# Altium PCB power-v3.1.PcbDoc (part 1 of 2)
Units mil, origin at the board's own origin, x right, y up, seen from the top; angles counter-clockwise.
Board outline 6120 x 3430.5 mil, 2 copper layers (Top Layer, Bottom Layer), stack 63.012 mil thick; 161 components, 68 nets, 413 pads, 6 vias.
Unrouted connection lines stored in the file: 242.
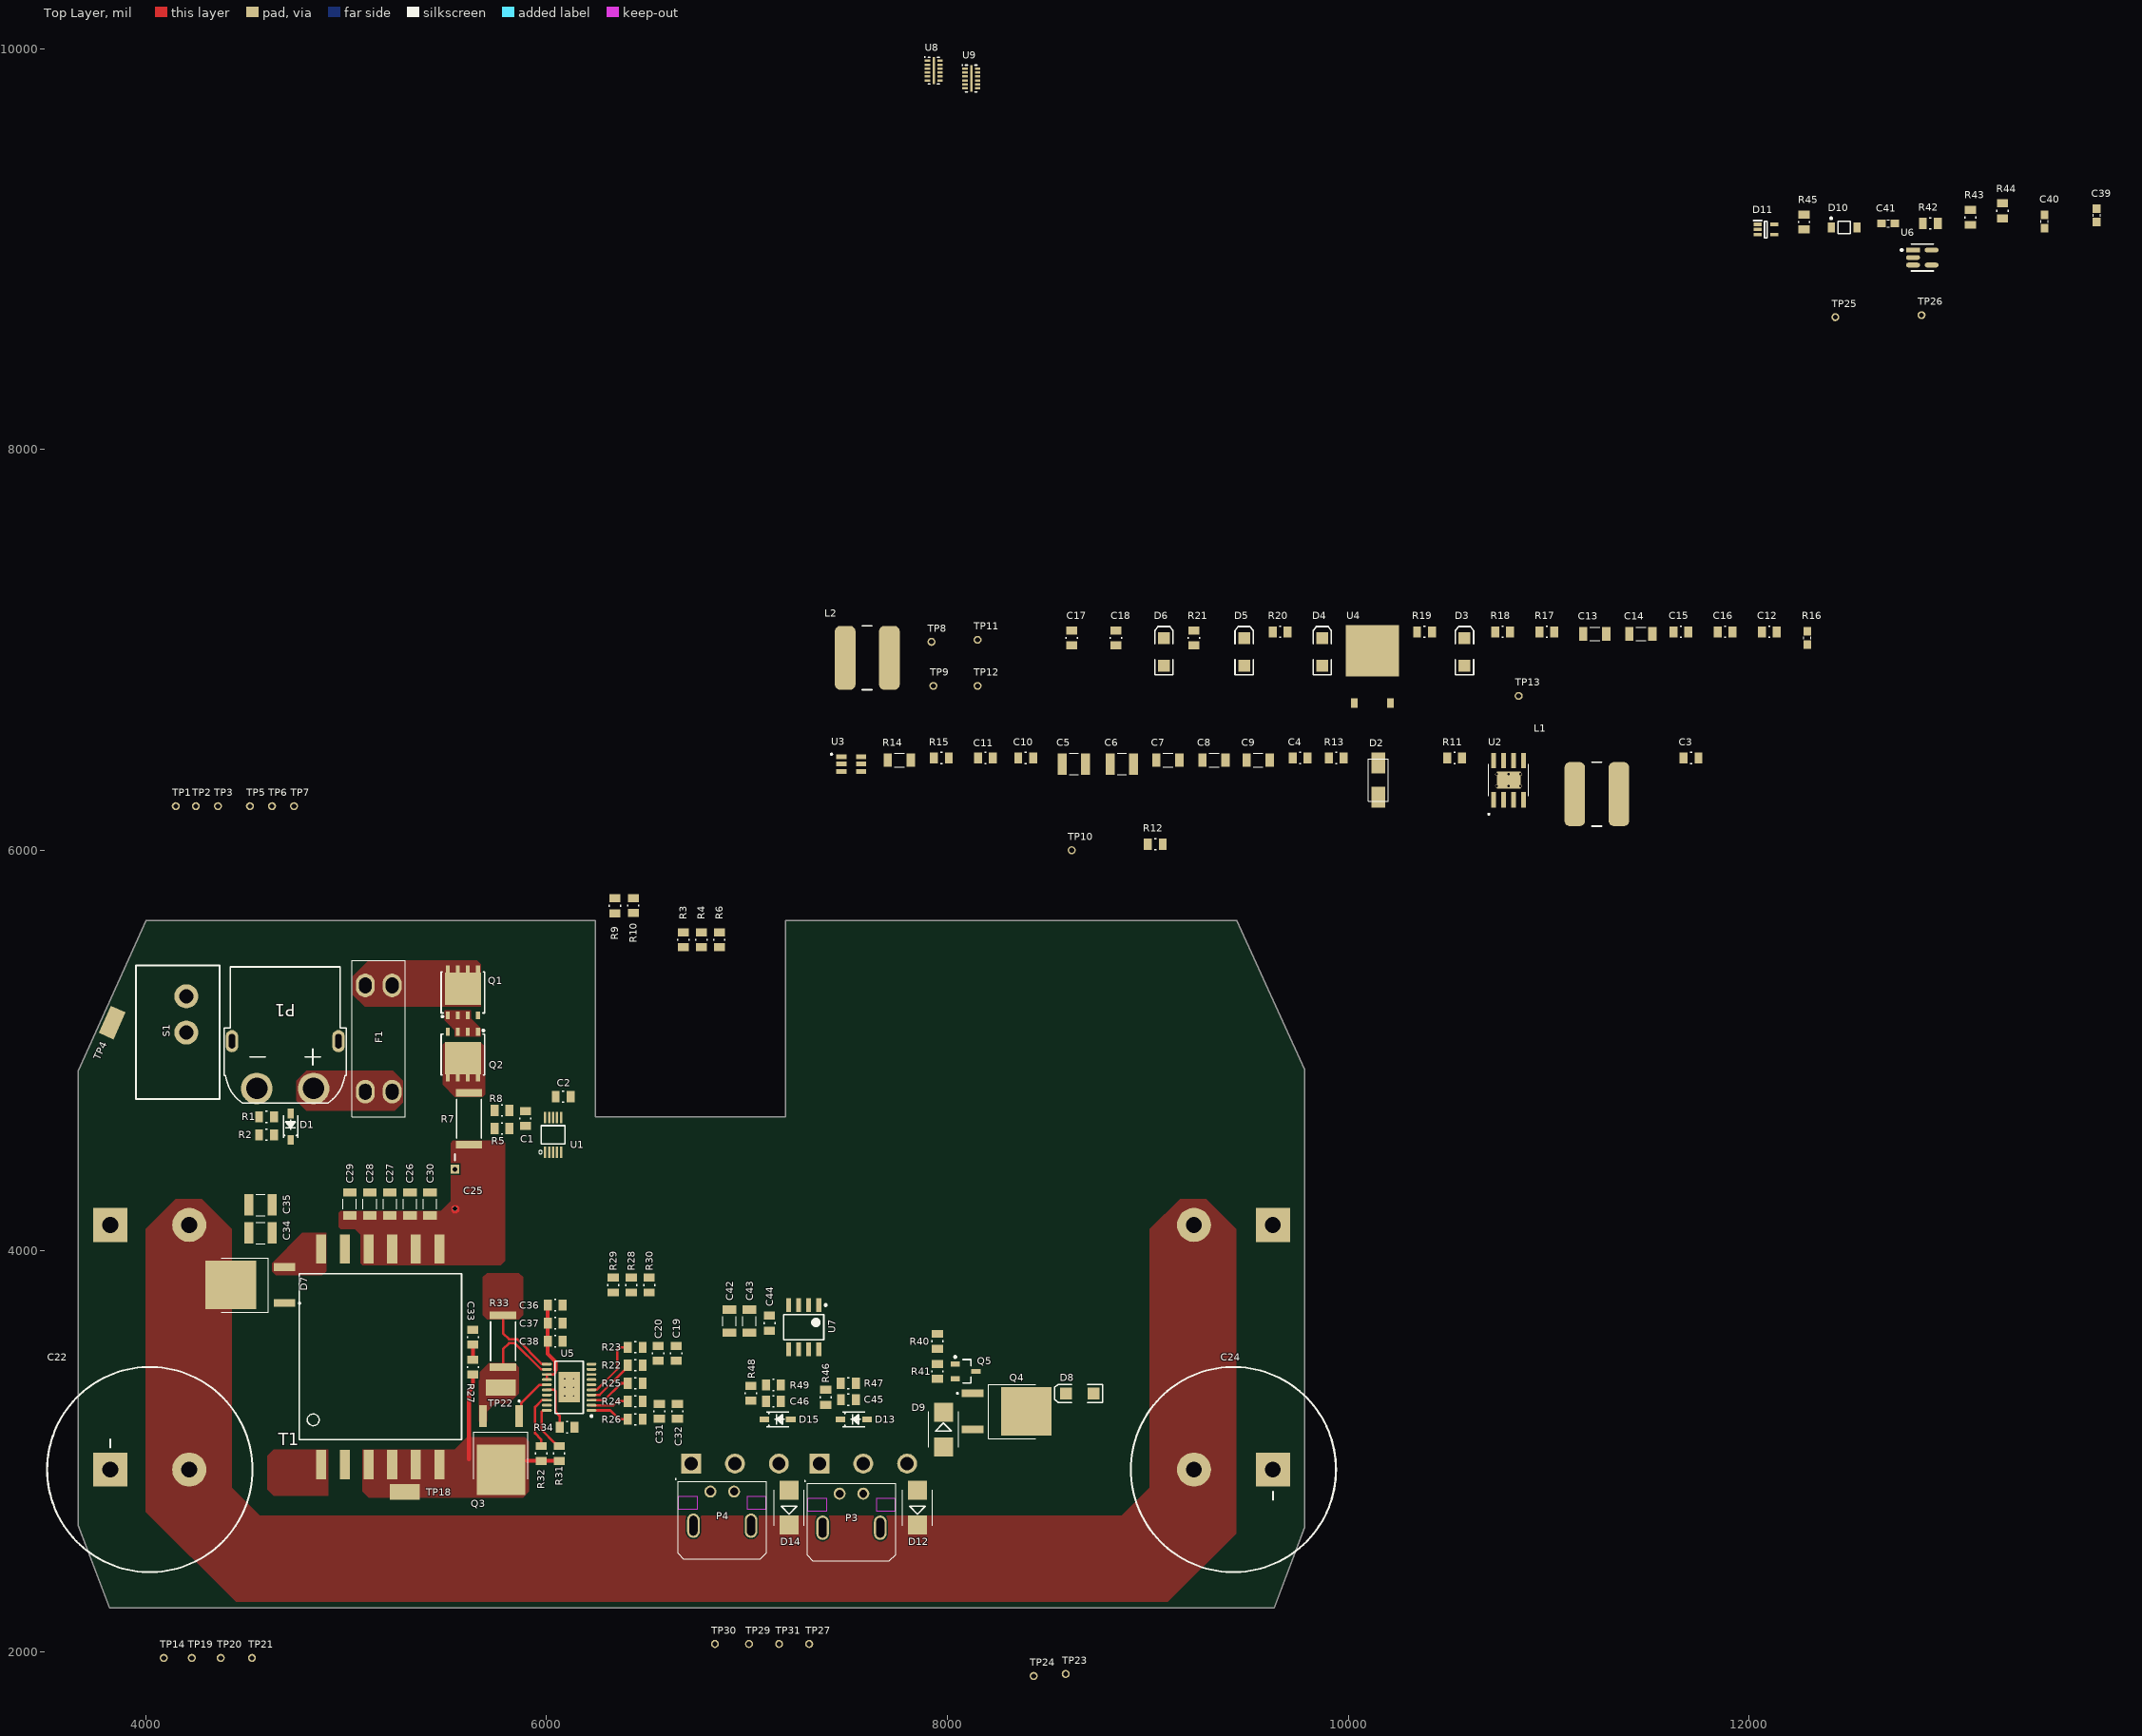
[diagram p0: Top Layer view]
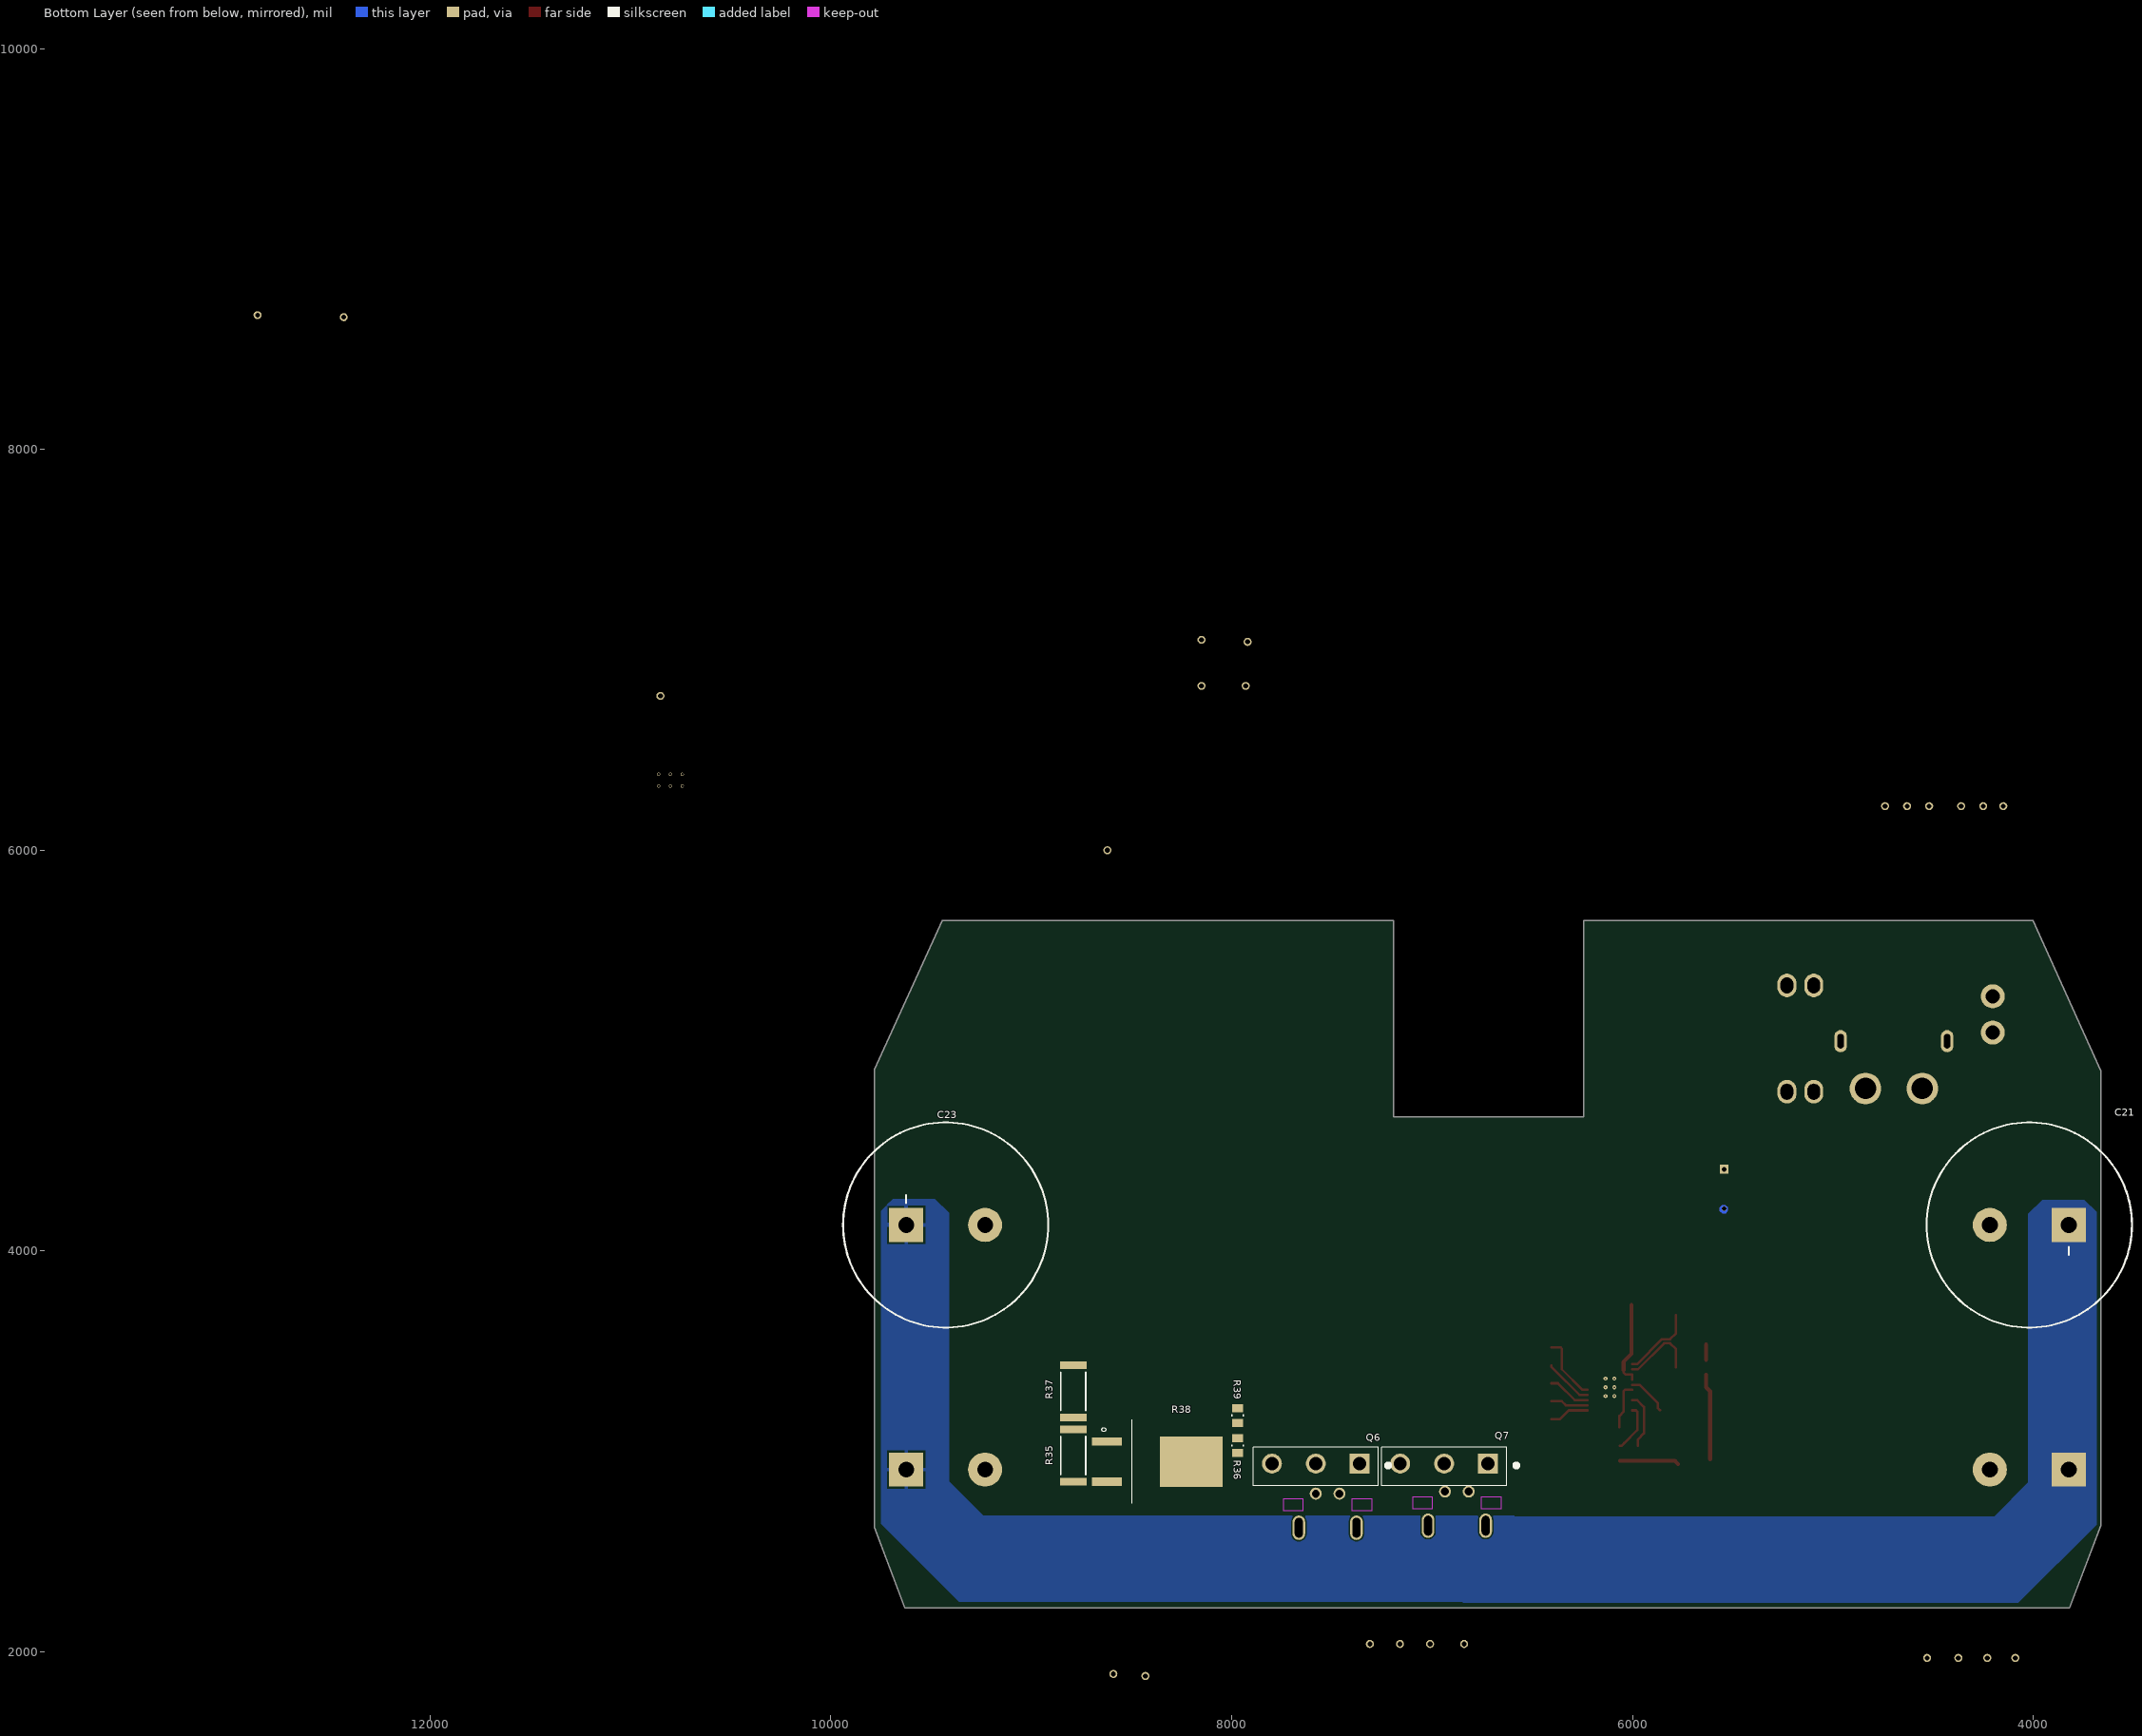
[diagram p1: Bottom Layer view, seen from below]

## Layer stack, top to bottom
Top Solder: solder mask 0.4, Solder Resist, Dk 3.5
Top Layer: signal copper 2.7559
Dielectric 1: dielectric 57.5, FR-4, Dk 4.8
Bottom Layer: signal copper 2.7559
Bottom Solder: solder mask 0.4, Solder Resist, Dk 3.5

## Board outline
9630,2220 9782.41,2621.28 9782.41,4905.08 9442.41,5650.5 7192.41,5650.5 7192.41,4670.5 6242.41,4670.5 6242.41,5650.5 4002.41,5650.5 3662.41,4899.48 3662.41,2631.16 3818.58,2220

## Design rules (kind name [scope] priority, off if disabled: settings)
BoardOutlineClearance [All] p1: gap=7.87 ignorepadtopadclearanceinfootprint=FALSE except(15.75: Arc-SplitBarrior Arc-SplitContinuation Track-SplitBarrior Track-SplitContinuation SMDPad-SplitBarrior SMDPad-SplitContinuation THPad-SplitBarrior THPad-SplitContinuation Via-SplitBarrior Via-SplitContinuation Fill-SplitBarrior Fill-SplitContinuation Poly-SplitBarrior Poly-SplitContinuation Region-SplitBarrior Region-SplitContinuation Text-SplitBarrior Text-SplitContinuation)
Clearance "Clearance Bottom Layer" [OnLayer('Bottom Layer')] p1: gap=8 ignorepadtopadclearanceinfootprint=TRUE except(10: Arc-Text Track-Text SMDPad-Text THPad-Text Via-Text Fill-Text Poly-Text Region-Text Text-Text)
Clearance "Clearance Top Layer" [OnLayer('Top Layer')] p2: gap=8 ignorepadtopadclearanceinfootprint=TRUE except(10: Arc-Text Track-Text SMDPad-Text THPad-Text Via-Text Fill-Text Poly-Text Region-Text Text-Text)
Clearance [All] p3: gap=7.87 ignorepadtopadclearanceinfootprint=FALSE except(3.5: Arc-Arc Arc-Track Arc-SMDPad Track-Track Track-SMDPad SMDPad-SMDPad; 5: Arc-Via Track-Via SMDPad-Via THPad-Via Via-Via; 10: Arc-Text Track-Text SMDPad-Text THPad-Text Via-Text Fill-Text Poly-Text Region-Text Text-Text)
HoleSize [All] p1: absolutevalues=TRUE maxlimit=248.03 minlimit=7.87 maxpercent=80.000 minpercent=20.000
MinimumAnnularRing [All] p1: minimumring=3
MinimumSolderMaskSliver [All] p1: minsoldermaskwidth=3.94
PolygonConnect PolygonConnect_14 [All vs IsNamedPolygon('+HV_L01_P024') Or IsNamedPolygon('+VBAT_L01_P018') Or IsNamedPolygon('GND_L01_P015') Or IsNamedPolygon('GND_L01_P016') Or IsNamedPolygon('NETD1_C_L01_P020') Or IsNamedPolygon('NETD7_IN_L01_P023') Or IsNamedPolygon('NETF1_3_L01_P019') Or IsNamedPolygon('NETQ3_D_L01_P008') Or IsNamedPolygon('NETQ3_S_L01_P013') Or IsNamedPolygon('+HV_L01_P026') Or IsNamedPolygon('VCC_L01_P022') Or IsNamedPolygon('VCC_RPP_L01_P021') Or IsNamedPolygon('GND_L02_P027') Or IsNamedPolygon('NONET_L02_P028')] p1: connectstyle=Direct reliefconductorwidth=10 reliefentries=4 polygonreliefangle="90 Angle" airgapwidth=10
PolygonConnect PolygonConnect_13 [All vs IsNamedPolygon('+VBAT_L01_P018') Or IsNamedPolygon('GND_L01_P015') Or IsNamedPolygon('GND_L01_P016') Or IsNamedPolygon('NETD1_C_L01_P020') Or IsNamedPolygon('NETF1_3_L01_P019') Or IsNamedPolygon('NETQ3_D_L01_P008') Or IsNamedPolygon('NETQ3_S_L01_P013') Or IsNamedPolygon('VCC_L01_P022') Or IsNamedPolygon('VCC_RPP_L01_P021')] p2: connectstyle=Direct reliefconductorwidth=10 reliefentries=4 polygonreliefangle="90 Angle" airgapwidth=10
PolygonConnect PolygonConnect_12 [All vs IsNamedPolygon('+VBAT_L01_P002') Or IsNamedPolygon('GND_L01_P014') Or IsNamedPolygon('GND_L01_P015') Or IsNamedPolygon('GND_L01_P016') Or IsNamedPolygon('NETD1_C_L01_P004') Or IsNamedPolygon('NETF1_3_L01_P017') Or IsNamedPolygon('NETP1_1_L01_P000') Or IsNamedPolygon('NETQ3_D_L01_P008') Or IsNamedPolygon('NETQ3_S_L01_P013') Or IsNamedPolygon('VCC_L01_P012') Or IsNamedPolygon('VCC_RPP_L01_P011')] p3: connectstyle=Direct reliefconductorwidth=10 reliefentries=4 polygonreliefangle="90 Angle" airgapwidth=10
PolygonConnect PolygonConnect_11 [All vs IsNamedPolygon('+VBAT_L01_P002') Or IsNamedPolygon('GND_L01_P014') Or IsNamedPolygon('GND_L01_P015') Or IsNamedPolygon('GND_L01_P016') Or IsNamedPolygon('NETD1_C_L01_P004') Or IsNamedPolygon('NETF1_3_L01_P006') Or IsNamedPolygon('NETP1_1_L01_P000') Or IsNamedPolygon('NETQ3_D_L01_P008') Or IsNamedPolygon('NETQ3_S_L01_P013') Or IsNamedPolygon('VCC_L01_P012') Or IsNamedPolygon('VCC_RPP_L01_P011')] p4: connectstyle=Direct reliefconductorwidth=10 reliefentries=4 polygonreliefangle="90 Angle" airgapwidth=10
PolygonConnect PolygonConnect_10 [All vs IsNamedPolygon('+VBAT_L01_P002')] p5: connectstyle=Direct reliefconductorwidth=10 reliefentries=4 polygonreliefangle="90 Angle" airgapwidth=10
PolygonConnect PolygonConnect_9 [All vs IsNamedPolygon('+VBAT_L01_P002') Or IsNamedPolygon('GND_L01_P014') Or IsNamedPolygon('GND_L01_P015') Or IsNamedPolygon('NETD1_C_L01_P004') Or IsNamedPolygon('NETF1_3_L01_P006') Or IsNamedPolygon('NETP1_1_L01_P000') Or IsNamedPolygon('NETQ3_D_L01_P008') Or IsNamedPolygon('NETQ3_S_L01_P013') Or IsNamedPolygon('VCC_L01_P012') Or IsNamedPolygon('VCC_RPP_L01_P011')] p6: connectstyle=Direct reliefconductorwidth=10 reliefentries=4 polygonreliefangle="90 Angle" airgapwidth=10
PolygonConnect PolygonConnect_8 [All vs IsNamedPolygon('NETQ3_S_L01_P013')] p7: connectstyle=Direct reliefconductorwidth=10 reliefentries=4 polygonreliefangle="90 Angle" airgapwidth=10
PolygonConnect PolygonConnect_7 [All vs IsNamedPolygon('+VBAT_L01_P002') Or IsNamedPolygon('NETD1_C_L01_P004') Or IsNamedPolygon('NETF1_3_L01_P006') Or IsNamedPolygon('NETP1_1_L01_P000') Or IsNamedPolygon('NETQ3_D_L01_P008') Or IsNamedPolygon('VCC_L01_P012') Or IsNamedPolygon('VCC_RPP_L01_P011')] p8: connectstyle=Direct reliefconductorwidth=10 reliefentries=4 polygonreliefangle="90 Angle" airgapwidth=10
PolygonConnect PolygonConnect_6 [All vs IsNamedPolygon('+VBAT_L01_P002') Or IsNamedPolygon('NETD1_C_L01_P004') Or IsNamedPolygon('NETF1_3_L01_P006') Or IsNamedPolygon('NETP1_1_L01_P000') Or IsNamedPolygon('VCC_RPP_L01_P005')] p9: connectstyle=Direct reliefconductorwidth=10 reliefentries=4 polygonreliefangle="90 Angle" airgapwidth=10
PolygonConnect PolygonConnect_5 [All vs IsNamedPolygon('NETD1_C_L01_P004')] p10: connectstyle=Direct reliefconductorwidth=10 reliefentries=4 polygonreliefangle="90 Angle" airgapwidth=10
PolygonConnect PolygonConnect_4 [All vs IsNamedPolygon('NETD1_C_L01_P004')] p11: connectstyle=Direct reliefconductorwidth=10 reliefentries=4 polygonreliefangle="90 Angle" airgapwidth=10
PolygonConnect PolygonConnect_3 [All vs IsNamedPolygon('+VBAT_L01_P002')] p12: connectstyle=Direct reliefconductorwidth=10 reliefentries=4 polygonreliefangle="90 Angle" airgapwidth=10
PolygonConnect PolygonConnect_2 [All vs IsNamedPolygon('+VBAT_L01_P002')] p13: connectstyle=Direct reliefconductorwidth=10 reliefentries=4 polygonreliefangle="90 Angle" airgapwidth=10
PolygonConnect [All vs IsNamedPolygon('NETP1_1_L01_P000')] p14: connectstyle=Direct reliefconductorwidth=10 reliefentries=4 polygonreliefangle="90 Angle" airgapwidth=10
PolygonConnect PolygonConnect_1 [All] p15: thpad.connectstyle=Relief thpad.reliefconductorwidth=20 thpad.reliefentries=4 thpad.polygonreliefangle="90 Angle" thpad.airgapwidth=10 smdpad.connectstyle=Relief smdpad.reliefconductorwidth=20 smdpad.reliefentries=4 smdpad.polygonreliefangle="90 Angle" smdpad.airgapwidth=10 via.connectstyle=Direct via.reliefconductorwidth=20 via.reliefentries=4 via.polygonreliefangle="90 Angle" via.airgapwidth=10
RoomDefinition "Kicker and Chipper" [InComponentClass('Kicker and Chipper')] p1: confinementstyle=ConfineIn formatcopy=TRUE lockcomponents=FALSE outline 8852.41,4050.5 6542.41,4050.5 6542.41,1690.5 8852.41,1690.5
RoomDefinition "Power Regulation" [InComponentClass('Power Regulation')] p2: confinementstyle=ConfineIn formatcopy=TRUE lockcomponents=FALSE outline 12612.41,7270.5 7182.41,7270.5 7182.41,3880.5 12612.41,3880.5
RoomDefinition "Power Input" [InComponentClass('Power Input')] p3: confinementstyle=ConfineIn formatcopy=TRUE lockcomponents=FALSE outline 7172.41,6340.5 3462.41,6340.5 3462.41,3620.5 7172.41,3620.5
RoomDefinition HV-Measurement [InComponentClass('HV-Measurement')] p4: confinementstyle=ConfineIn formatcopy=TRUE lockcomponents=FALSE outline 14046.14,9437.9 11816.14,9437.9 11816.14,8564.43 14046.14,8564.43
RoomDefinition "Auto Discharge" [InComponentClass('Auto Discharge')] p5: confinementstyle=ConfineIn formatcopy=TRUE lockcomponents=FALSE outline 9390,4680.5 7662.41,4680.5 7662.41,1560.5 9390,1560.5
RoomDefinition "Connections and Communications" [InComponentClass('Connections and Communications')] p6: confinementstyle=ConfineIn formatcopy=TRUE lockcomponents=FALSE outline 7162.41,8740.81 11242.41,8740.81 11242.41,10620.81 7162.41,10620.81
RoomDefinition "Flyback Converter" [InComponentClass('Flyback Converter')] p7: confinementstyle=ConfineIn formatcopy=TRUE lockcomponents=FALSE outline 7792.41,4786.03 3462.41,4786.03 3462.41,1296.03 7792.41,1296.03
RoutingCorners [All] p1: cornerstyle=Round minsetback=100 maxsetback=100
RoutingVias [All] p1: holewidth=19.68 width=39.37 viastyle="Through Hole" minholewidth=7.87 minwidth=17.72 maxholewidth=39.37 maxwidth=78.74
SilkToSilkClearance [All] p1: silktosilkclearance=3.94
SilkToSolderMaskClearance [IsPad] p1: minsilkscreentomaskgap=3.94 clearancetoexposedcopper=TRUE
SolderMaskExpansion [All] p1: expansion=4 istentingtop=FALSE
Width [All] p1: maxlimit=100 minlimit=3.5 preferedwidth=15
25 further rules are at their usual default settings.

## Classes and differential pairs
component class "Power Regulation": C3 C4 C5 C6 C7 C8 C9 C10 C11 C12 C13 C14 C15 C16 C17 C18 D2 D3 D4 D5 D6 L1 L2 R11 R12 R13 R14 R15 R16 R17 R18 R19 R20 R21 TP8 TP9 TP10 TP11 TP12 TP13 U2 U3 U4
component class "Power Input": C1 C2 D1 F1 P1 Q1 Q2 R1 R2 R3 R4 R5 R6 R7 R8 R9 R10 S1 TP1 TP2 TP3 TP4 TP5 TP6 TP7 U1
component class "Kicker and Chipper": C42 C43 C44 C45 C46 D12 D13 D14 D15 P3 P4 Q6 Q7 R46 R47 R48 R49 TP27 TP29 TP30 TP31 U7
component class HV-Measurement: C39 C40 C41 D10 D11 R42 R43 R44 R45 TP25 TP26 U6
component class "Flyback Converter": C19 C20 C21 C22 C23 C24 C25 C26 C27 C28 C29 C30 C31 C32 C33 C34 C35 C36 C37 C38 D7 Q3 R22 R23 R24 R25 R26 R27 R28 R29 R30 R31 R32 R33 R34 T1 TP14 TP18 TP19 TP20 TP21 TP22 U5
component class "Connections and Communications": U8 U9
component class "Auto Discharge": D8 D9 Q4 Q5 R35 R36 R37 R38 R39 R40 R41 TP23 TP24

## Components (designator, comment, footprint, x,y, rotation, side; value= is the part's Value field where it differs from the comment)
C1 "100nF 50V" 0805 5893.86,4660.95 r270 top value=100nF
C2 "100nF 50V" 0805 6082.41,4770.5 r0 top value=100nF
C3 "100nF 50V" 0805 11710,6460 r0 top value=100nF
C4 "8.2nF 50V" 0805 9760,6460 r0 top value=8.2nF
C5 "10uF 50V" 1210 8630,6430 r0 top value=10uF
C6 "10uF 50V" 1210 8870,6430 r0 top value=10uF
C7 "10UF 25V" 1206 9100,6450 r0 top value=10uF
C8 "10UF 25V" 1206 9330,6450 r0 top value=10uF
C9 "10UF 25V" 1206 9550,6450 r0 top value=10uF
C10 "2700pF 50V" 0805 8390,6460 r0 top value=2700pF
C11 "10pF" 0805 8190,6460 r0 top
C12 "100nF 50V" 0805 12100,7090 r0 top value=100nF
C13 "10UF 25V" 1206 11230,7080 r0 top value=10uF
C14 "10UF 25V" 1206 11460,7080 r0 top value=10uF
C15 "22uF 10V" 0805 11660,7090 r0 top value=22uF
C16 "22uF 10V" 0805 11880,7090 r0 top value=22uF
C17 "4.7uF" 0805 8620,7060 r90 top
C18 "4.7uF" 0805 8840,7060 r90 top
C19 "10uF" 0805 6646.79,3490.5 r90 top
C20 "0.10uF" 0805 6556.79,3490.5 r90 top
C21 "1000uF 250V" "RADIAL, CAN - THRU 25.4mm" 3823.28,4130.5 r0 bottom
C22 "1000uF 250V" "RADIAL, CAN - THRU 25.4mm" 3823.28,2910 r0 top
C23 "1000uF 250V" "RADIAL, CAN - THRU 25.4mm" 9623.81,4130.5 r180 bottom
C24 "1000uF 250V" "RADIAL, CAN - THRU 25.4mm" 9623.81,2910 r180 top
C25 "680uF" "RADIAL, CAN - THRU 10mm - RIGHTANGLE" 5542.41,4310.5 r270 top
C26 "10UF 25V" 1206 5318.11,4234.77 r270 top value=10uF
C27 "10UF 25V" 1206 5218.11,4234.77 r270 top value=10uF
C28 "10UF 25V" 1206 5118.11,4234.77 r270 top value=10uF
C29 "10UF 25V" 1206 5018.11,4234.77 r270 top value=10uF
C30 "10UF 25V" 1206 5418.11,4234.77 r270 top value=10uF
C31 "10uF" 0805 6562.41,3200.5 r270 top
C32 "0.10uF" 0805 6652.41,3200.5 r270 top
C33 "2.2uF" 0805 5632.41,3570.5 r90 top
C34 "0.1uF" 1210 4572.41,4090.5 r0 top
C35 "0.1uF" 1210 4572.41,4230.5 r0 top
C36 "0.10uF" 0805 6042.41,3730.5 r0 top
C37 "0.10uF" 0805 6042.41,3640.5 r0 top
C38 "10uF" 0805 6042.41,3550.5 r0 top
C39 "1.0uF" 0603 13733.73,9167.4 r90 top
C40 "0.010uF" 0603 13473.73,9137.4 r90 top
C41 "0.010uF" 0603 12693.73,9127.4 r0 top
C42 "10UF 25V" 1206 6912.41,3650.5 r90 top value=10uF
C43 "10UF 25V" 1206 7012.41,3650.5 r90 top value=10uF
C44 "0.1uF 25V" 0805 7112.41,3640.5 r270 top value=0.1uF
C45 "0.1uF 25V" 0805 7505.61,3258.4 r180 top value=0.1uF
C46 "0.1uF 25V" 0805 7132.41,3250.5 r180 top value=0.1uF
D1 "3SMBJ5929B-TP" SOD-123 4722.41,4620.5 r90 top
D2 "40V 3A" DO-214AC 10150,6350 r90 top
D3 "LED2" 3.2X1.6X1.1 10580,6990 r90 top
D4 "LED2" 3.2X1.6X1.1 9870,6990 r90 top
D5 "LED2" 3.2X1.6X1.1 9480,6990 r90 top
D6 "LED2" 3.2X1.6X1.1 9080,6990 r90 top
D7 "VS-5EWH06FN-M3" "DPAK (TO-252)" 4527.41,3830.5 r90 top
D8 "LED2" 3.2X1.6X1.1 8660,3290 r180 top
D9 "3SMBJ5929B-TP" DO-214AA 7980,3110 r270 top
D10 "MMSZ4684T1G" ONSC-SOD-123-2-425-04_V 12473.73,9107.4 r0 top
D11 "DIODE TVS CPDV5-3V3UP" SOT65P230X110-5N 12083.73,9097.4 r0 top
D12 "SD560BTR" DO-214AA 7850,2720 r90 top
D13 "SM5817PL-TP" SOD-123 7532.46,3160.5 r0 top
D14 "SD560BTR" DO-214AA 7210,2720 r90 top
D15 "SM5817PL-TP" SOD-123 7152.41,3160.5 r0 top
F1 "3557-2" FUSE_3557-2 5162.41,5060.5 r90 top
L1 "SRN8040TA-150M" INDP8279X40M 11240.13,6280 r0 top
L2 "SRN8040-3R3Y" INDP8279X40M 7600,6960 r0 top
P1 "XT60" Amass_XT60PW-M 4695.77,4811.23 r0 top value=N/A
P3 "4365002" 43650-02 7520.94,2619.92 r0 top value=N/A
P4 "4365002" 43650-02 6876.3,2630 r0 top value=N/A
Q1 "AON6407" 8-PowerSMD 5582.41,5290.5 r90 top
Q2 "AON6407" 8-PowerSMD 5582.41,4980.5 r270 top
Q3 "IPD320N20N3GATMA1" "DPAK (TO-252)" 5772.41,3011.63 r180 top
Q4 "STD11N60DM2" "DPAK (TO-252)" 8290,3200 r270 top
Q5 "BSS127SSN-7" SOT95P245X89-3M 8090,3400 r0 top
Q6 "FGY75N60SMD" TO-247-3 7361.1,2940 r0 bottom
Q7 "FGY75N60SMD" TO-247-3 6721.1,2940 r0 bottom
R1 "100k" 0805 4602.41,4670.5 r180 top
R2 "100k" 0805 4602.41,4580.5 r180 top
R3 "10k" 0805 6681.68,5553.5 r270 top
R4 "10k" 0805 6771.68,5553.5 r270 top
R5 "10.0" 0805 5776.86,4611.69 r180 top
R6 "10k" 0805 6861.68,5553.5 r270 top
R7 "2mOHM" 2512 5612.41,4660.5 r90 top
R8 "10.0" 0805 5776.86,4701.69 r180 top
R9 "10k" 0805 6340,5723 r270 top
R10 "10k" 0805 6432.41,5723.5 r270 top
R11 "169k" 0805 10530,6460 r0 top
R12 "10.2k" 0805 9037,6030 r0 top
R13 "10k" 0805 9940,6460 r0 top
R14 "18.7k" 1206 7760,6450 r0 top
R15 "732" 0805 7970,6460 r0 top
R16 "56.2k" 0603 12290,7060 r90 top
R17 "10k" 0805 10990,7090 r0 top
R18 "110" 0805 10770,7090 r0 top
R19 "270" 0805 10380,7090 r0 top
R20 "1k" 0805 9660,7090 r0 top
R21 "1.96K" 0805 9230,7060 r90 top value=1.96k
R22 "174k" 0805 6442.41,3430.5 r0 top
R23 "255k" 0805 6442.41,3520.5 r0 top
R24 "330k" 0805 6442.41,3250.5 r0 top
R25 "495k" 0805 6442.41,3340.5 r0 top
R26 "25.5k" 0805 6442.41,3160.5 r180 top
R27 "100k" 0805 5632.41,3420.5 r270 top
R28 "100k" 0805 6422.41,3830.5 r90 top
R29 "100k" 0805 6332.41,3830.5 r90 top
R30 "10k" 0805 6512.41,3830.5 r270 top
R31 "11.5k" 0805 6062.41,2990.5 r90 top
R32 "25.5k" 0805 5972.41,2990.5 r90 top
R33 "7mOHM" 2512 5782.41,3550.35 r270 top
R34 "1.05k" 0805 6102.41,3120.5 r0 top
R35 "18k 1W" 2512 8790,2980 r270 bottom value=18k
R36 "5.1M" 0805 7970,3030 r270 bottom
R37 "18k 1W" 2512 8790,3300 r270 bottom value=18k
R38 "1k 50W" "D2PAK (TO-263)" 8370,2950 r270 bottom value=1.5k
R39 "5.1M" 0805 7970,3180 r270 bottom
R40 "270k" 0805 7950,3550 r90 top
R41 "100k" 0805 7950,3400 r90 top
R42 "330k" 0805 12903.73,9127.4 r0 top
R43 "330k" 0805 13103.73,9157.4 r90 top
R44 "330k" 0805 13263.73,9190.4 r90 top
R45 "13k" 0805 12273.73,9134.4 r90 top
R46 "110" 0805 7392.41,3270.5 r90 top
R47 "10k" 0805 7505.22,3340.5 r0 top
R48 "110" 0805 7019.21,3290.5 r90 top
R49 "10k" 0805 7132.41,3332.59 r0 top
S1 "SPST 8.5A 125V" "SPST GF-123-0054" 4202.41,5271.5 r270 top
T1 "DA2034" DA2034 5192.41,3490.5 r90 top
TP1 "Test Point (Via)" TP 4150,6220 r90 top
TP2 "Test Point (Via)" TP 4250,6220 r90 top
TP3 "Test Point (Via)" TP 4360,6220 r90 top
TP4 "Test Point - 5019" TP380X203 3832.41,5140.5 r245.65 top
TP5 "Test Point (Via)" TP 4520,6220 r90 top
TP6 "Test Point (Via)" TP 4630,6220 r90 top
TP7 "Test Point (Via)" TP 4740,6220 r90 top
TP8 "Test Point (Via)" TP 7920,7040 r90 top
TP9 "Test Point (Via)" TP 7930,6820 r90 top
TP10 "Test Point (Via)" TP 8620,6000 r90 top
TP11 "Test Point (Via)" TP 8150,7050 r90 top
TP12 "Test Point (Via)" TP 8150,6820 r90 top
TP13 "Test Point (Via)" TP 10850,6770 r90 top
TP14 "Test Point (Via)" TP 4090,1970 r180 top
TP18 "Test Point - 5019" TP380X203 5292.41,2798.34 r180 top
TP19 "Test Point (Via)" TP 4230,1970 r90 top
TP20 "Test Point (Via)" TP 4374,1970 r90 top
TP21 "Test Point (Via)" TP 4530,1970 r90 top
TP22 "Test Point - 5019" TP380X203 5772.41,3319.87 r180 top
TP23 "Test Point (Via)" TP 8590,1890 r90 top
TP24 "Test Point (Via)" TP 8430,1880 r90 top
TP25 "Test Point (Via)" TP 12430,8660 r90 top
TP26 "Test Point (Via)" TP 12860,8670 r90 top
TP27 "Test Point (Via)" TP 7310,2040 r90 top
TP29 "Test Point (Via)" TP 7010,2040 r90 top
TP30 "Test Point (Via)" TP 6840,2040 r90 top
TP31 "Test Point (Via)" TP 7160,2040 r90 top
U1 "INA226AIDGSR" 10-VSSOP 6032.41,4580.5 r90 top
U2 "TPS54531DDA" 8-PowerSOIC 10800,6350 r90 top
U3 "TPS563200DDCR" TSOT-23-6 7520,6430 r0 top
U4 "ZLDO1117K33TC" TO-252-3 10120,6990 r0 top
U5 "LT3751EFE#PBF" LT-FE-20-EPV-CB_L 6112.41,3320.5 r180 top
U6 "MIC7300YM5-TR" FP-SOT23-5LD-PL-1-IPC_A 12863.73,8957.4 r0 top
U7 "IR4427STRPBF" 8-SOIC 7282.41,3620.5 r270 top
U8 "TPD6F002DSVR" PSON50P140X80_HS-13N 7931.5,9890.16 r0 top
U9 "TPD6F002DSVR" PSON50P140X80_HS-13N 8118.5,9850.79 r0 top

## Footprints (in the part's own frame and the unit in brackets; to place one, negate y for a bottom-side part, rotate by r counter-clockwise, add the part's x,y. Pads: shape width x height; smd on the part's side, far side on the other; paste and mask are expansions set on the pad)
3.2X1.6X1.1 [mm]
  rect 1.5x1.5 smd: 1(-1.75,0) 2(1.75,0)
  silkscreen extent -2.9,-1.15 3.2,1.15
8-PowerSMD [mm]
  rect 4.12x4.6 smd: D(0.46,0)
  rect 1x0.5 smd: D(2.9,-1.905) D(2.9,-0.635) D(2.9,0.635) D(2.9,1.905) G(-2.9,-1.905) S(-2.9,-0.635) S(-2.9,0.635) S(-2.9,1.905)
  silkscreen extent -3.13,-2.75 2.6,2.75, body extent -3.07,-2.57 3.08,2.58, height 1.1
8-PowerSOIC [mm]
  rect 1.97x0.6 smd: 1(-2.475,1.905) 2(-2.475,0.635) 3(-2.475,-0.635) 4(-2.475,-1.905) 5(2.475,-1.905) 6(2.475,-0.635) 7(2.475,0.635) 8(2.475,1.905)
  rect 2.13x3 smd: 9(0,0)
  round 0.4 hole 0.3: V1(-0.75,1.5) V2(0.75,1.5) V3(-0.75,0) V4(0.75,0) V5(-0.75,-1.5) V6(0.75,-1.5)
  silkscreen extent -4.42,-2.52 2,2.6, body extent -3.1,-2.49 3.1,2.49, height 1.68
8-SOIC [mm]
  rect 1.75x0.65 smd: 1(-2.8,1.905) 2(-2.8,0.635) 3(-2.8,-0.635) 4(-2.8,-1.905) 5(2.8,-1.905) 6(2.8,-0.635) 7(2.8,0.635) 8(2.8,1.905)
  silkscreen extent -2.92,-2.55 1.6,2.91, body extent -2,-2.55 2,2.55, height 1.7
10-VSSOP [mm]
  rect 1.45x0.3 smd: 1(-2.2,1) 2(-2.2,0.5) 3(-2.2,0) 4(-2.2,-0.5) 5(-2.2,-1) 6(2.2,-1) 7(2.2,-0.5) 8(2.2,0) 9(2.2,0.5) 10(2.2,1)
  silkscreen extent -2.42,-1.5 1.15,1.82
0603 [mm]
  rect 1.1x1 smd: 1(-0.85,0) 2(0.85,0)
  silkscreen extent -0.15,-0.45 0.15,0.45
0805 [mil]
  rect 40x55 smd: 1(-37,0) 2(37,0)
  silkscreen extent -4,-28 4,28, body extent -47,-28 47,28, height 24
1206 [mm]
  rect 1.05x1.72 smd: 1(-1.46,0) 2(1.46,0)
  silkscreen extent -0.62,-0.85 0.62,0.85
1210 [mm]
  rect 1.16x2.72 smd: 1(-1.475,0) 2(1.475,0)
  silkscreen extent -0.57,-1.35 0.57,1.35
2512 [mm] "Chip Resistor, 2-Leads, Body 6.35x3.10mm, IPC Low Density"
  rect 0.95x3.35 smd: 1(-3.3,0) 2(3.3,0)
  silkscreen extent -2.45,-1.58 2.45,1.58, body extent -3.22,-1.63 3.22,1.63, height 0.6
43650-02 [mm] "Molex Microfit 2PIN RightAngle Thru"
  round 1.52 hole 1.02: 1(-1.5,4.32) 2(1.5,4.32)
  oval 1.6x3.1 hole 1 slot 2.49 at 90 deg: NC(-3.65,0) NC(3.65,0)
  Keep-Out Layer region: -5.575,2.1 -3.125,2.1 -3.125,3.7 -5.575,3.7
  Keep-Out Layer region: 5.575,3.7 3.125,3.7 3.125,2.1 5.575,2.1
  silkscreen extent -5.96,-4.2 5.6,5.96, body extent -4.83,-4.55 4.82,5.35, height 2.7
Amass_XT60PW-M [mm] "Right angle XT60 Male Socket"
  round 4 hole 2.7: 1(-3.6,0) 2(3.6,0)
  rrect100% 1.6x2.8 hole 1.8 slot 0.8 at 0 deg: Un1(6.75,6) Un2(-6.75,6)
  silkscreen extent -7.76,-1.85 7.76,15.42, body extent -7.95,-1.95 7.95,16.3, height 8.4
"D2PAK (TO-263)" [mm]
  rect 1.06x3.78 smd: 1(-2.54,-6.4) 2(2.54,-6.4)
  rect 6.39x8 smd paste-5 mask+0: 3(0,4.29)
  silkscreen extent -5.34,-7.05 5.32,-3.24, body extent -5.08,-7.62 5.08,7.62, height 4.83
DA2034 [mm]
  rect 3.7x1.27 smd: 1(-14.1,8.059) 2(-14.1,5.059) 3(-14.1,2.059) 4(-14.1,-0.941) 5(-14.1,-3.941) 6(-14.1,-6.941) 7(13.206,-6.941) 8(13.206,-3.941) 9(13.206,-0.941) 10(13.206,2.059) 11(13.206,5.059) 12(13.206,8.059)
  silkscreen extent -10.93,-9.73 10.07,10.85, body extent -14.82,-9.68 13.83,10.89, height 11.18
DO-214AA [mm]
  rect 2.4x2.4 smd: A(2.2,0) C(-2.2,0)
  silkscreen extent -2.26,-1.91 2.26,1.91
DO-214AC [mm]
  rect 2.65x1.75 smd: A(-2.15,0) C(2.15,0)
  silkscreen extent -2.7,-1.25 2.7,1.25
"DPAK (TO-252)" [mil]
  rect 38.58x107.87 smd: 1(-90,-165) 3(90,-165)
  rect 241.67x251.97 smd paste-157.48: 2(0,103)
  silkscreen extent -135,-244 135,150, body extent -128,-185 128,205, height 97
FP-SOT23-5LD-PL-1-IPC_A [mm]
  rect 1.756x0.61 smd paste+0 mask+0: 1(-1.175,0.95)
  rrect100% 1.756x0.61 smd paste+0 mask+0: 2(-1.175,0) 3(-1.175,-0.95) 4(1.175,-0.95) 5(1.175,0.95)
  silkscreen extent -2.73,-1.7 1.4,1.7, body extent -2.55,-1.95 2.55,1.95, height 0.25
FUSE_3557-2 [mm]
  oval 3x2.4 hole 1.6 slot 2 at 0 deg: 1(-6.735,1.7) 2(-6.735,-1.7) 3(6.735,1.7) 4(6.735,-1.7)
  silkscreen extent -9.9,-3.36 9.9,3.36, body extent -9.95,-3.37 9.86,3.36, height 7.38
INDP8279X40M [mm] "Precision Wire Wound Inductor, 2-Leads, Body 8.15x7.90mm, IPC Low Density"
  rrect50% 2.6x8.1 smd: 1(-2.8,0) 2(2.8,0)
  silkscreen extent -0.63,-4.05 0.63,4.05, body extent -4.01,-4 4.01,4, height 4
LT-FE-20-EPV-CB_L [mm] "SOP, 20-Leads, Body 6.6x4.5mm, Pitch 0.65mm, Thermal Pad 3.86x2.74mm, IPC High Density"
  oval 1.25x0.35 smd: 1(-2.825,2.925) 2(-2.825,2.275) 3(-2.825,1.625) 4(-2.825,0.975) 5(-2.825,0.325) 6(-2.825,-0.325) 7(-2.825,-0.975) 8(-2.825,-1.625) 9(-2.825,-2.275) 10(-2.825,-2.925) 11(2.825,-2.925) 12(2.825,-2.275) 13(2.825,-1.625) 14(2.825,-0.975) 15(2.825,-0.325) 16(2.825,0.325) 17(2.825,0.975) 18(2.825,1.625) 19(2.825,2.275) 20(2.825,2.925)
  rect 2.74x3.86 smd: 21(0,0)
  silkscreen extent -2.95,-3.3 1.8,3.77, body extent -2.25,-3.3 2.25,3.3, height 1.2
ONSC-SOD-123-2-425-04_V [mm] "SOD, 2-Leads, Body 2.69x1.6mm"
  rect 0.91x1.22 smd: 1(-1.635,0) 2(1.635,0)
  silkscreen extent -1.76,-0.8 0.78,1.28, body extent -1.35,-0.8 1.35,0.8, height 1.35
PSON50P140X80_HS-13N [mm] "PSON, 12-Leads, Body 3.00x1.35mm, Pitch 0.50mm, Thermal Pad 3.05x0.31mm, IPC Medium Density"
  rect 0.7x0.3 smd: 1(-0.8,1.25) 2(-0.8,0.75) 3(-0.8,0.25) 4(-0.8,-0.25) 5(-0.8,-0.75) 6(-0.8,-1.25) 7(0.8,-1.25) 8(0.8,-0.75) 9(0.8,-0.25) 10(0.8,0.25) 11(0.8,0.75) 12(0.8,1.25)
  rect 0.31x3.4 smd: 13(0,0)
  silkscreen extent -1.17,-1.7 0.72,1.75, body extent -0.72,-1.55 0.72,1.55, height 0.8
"RADIAL, CAN - THRU 10mm - RIGHTANGLE" [mm]
  rect 1.108x1.108 hole 0.6: NEG(-2.5,0)
  round 0.6 hole 0.6: POS(2.5,0)
  Top Layer region: 3.097,0.24 2.81,0.553 2.387,0.571 2.074,0.285 2.056,-0.139 2.342,-0.451 2.766,-0.47 3.078,-0.183
  Bottom Layer region: 3.097,0.24 2.81,0.553 2.387,0.571 2.074,0.285 2.056,-0.139 2.342,-0.451 2.766,-0.47 3.078,-0.183
  Multi-Layer region: 3.097,0.24 2.81,0.553 2.387,0.571 2.074,0.285 2.056,-0.139 2.342,-0.451 2.766,-0.47 3.078,-0.183
  silkscreen extent -4.4,0 -3.6,0, body extent -5,-23.8 5,-1.8, height 11
"RADIAL, CAN - THRU 25.4mm" [mil]
  rect 170x170 hole 78.74: NEG(0,0)
  round 170 hole 78.74: POS(393.7,0)
  silkscreen extent -315,-512 709,512, body extent -303,-500 697,500, height 1772
SOD-123 [mil]
  rect 48x30 smd: A(66,0) C(-66,0)
  silkscreen extent -56,-36 56,36
SOT65P230X110-5N [mm]
  rect 1.05x0.45 smd: 1(-1.05,0.65) 2(-1.05,0) 3(-1.05,-0.65) 4(1.05,-0.65) 5(1.05,0.65)
  silkscreen extent -1.58,-1.05 0.18,1.12, body extent -1.15,-1.05 1.15,1.05, height 1.1
SOT95P245X89-3M [mm] "SOT23, 3-Leads, Body 2.90x2.45mm, Pitch 0.95mm, IPC Low Density"
  rect 1.2x0.65 smd: D(1.3,0) G(-1.3,0.95) S(-1.3,-0.95)
  silkscreen extent -1.42,-1.5 0.7,1.95, body extent -0.7,-1.5 0.7,1.5, height 0.89
"SPST GF-123-0054" [mil]
  round 120 hole 70: 0(0,0) 1(181,0)
  silkscreen extent -154,-252 512,165, body extent -145,-243 503,157, height 589
TO-247-3 [mm]
  rect 2.52x2.52 hole 1.68: 1(0,0)
  round 2.52 hole 1.68: 2(5.56,0) 3(11.12,0)
  silkscreen extent -3.85,-2.04 13.5,2.78, body extent -2.44,-25.55 13.56,0.35, height 6.3
TO-252-3 [mil]
  rect 35x48 smd: 1(-90,-256) 3(90,-256)
  rect 265x256 smd: 2(0,6)
TP [mil] "Test point (40mil Standard)"
  round 40 hole 25: 1(0,0)
TP380X203 [mm]
  rect 3.8x2.03 smd: 1(0,0)
TSOT-23-6 [mm] "SOT-23-6 Thin"
  rect 1.3x0.6 smd: 1(-1.255,0.95) 2(-1.255,0) 3(-1.255,-0.95) 4(1.255,-0.95) 5(1.255,0) 6(1.255,0.95)
  silkscreen extent -2.6,1.15 -2.4,1.35, body extent -1.4,-1.45 1.4,1.45, height 0.97

## Part data
C1 C2 C3 C12: library part "CAP 100nF 50V", "CAP CER 0.1UF 50V X7R 0805", Package=0805, Rating=50V, Tolerance=10%
C4: library part "CAP 8.2nF 50V", "CAP CER 8200PF 50V X7R 0805", Operating Temperature="-55°C ~ 125°C", Package=0805, Rating=50V, Temperature Coefficient=X7R, Tolerance=10%
C5 C6: library part "CAP 10uF 50V", "CAP CER 10UF 50V X7R", Package=1210, Rating=50V, Tolerance=10%, ComponentLink1Description=digikey, ComponentLink1URL=https://www.digikey.ca/en/products/detail/kemet/C1210C106M5RACTU/4918883
C7 C8 C9 C13 C14 C26 C27 C28 C29 C30 C42 C43: library part "CAP 10uF 25V", "CAP CER 10UF 25V X5R 1206", Operating Temperature="-55°C ~ 85°C", Package=1206, Rating=25V, Temperature Coefficient=X5R, Tolerance=10%
C10: library part "CAP 2700pF 50V", "CAP CER 2700PF 50V X7R 0805", Operating Temperature="-55°C ~ 125°C", Package=0805, Rating=50V, Temperature Coefficient=X7R, Tolerance=10%
C11: library part "CAP 10pF 50V", "CAP CER 10PF 50V X7R 0603/0805", Operating Temperature="-55°C ~ 125°C", Package=0603/0805, Rating=50V, Temperature Coefficient=X7R, Tolerance=10%
C15 C16: library part "CAP 22uF 10V", "CAP CER 2.2UF 10V X5R 0805", Operating Temperature="-55°C ~ 85°C", Package=0805, Rating=10V, Temperature Coefficient=X5R, Tolerance=20%
C17 C18: library part "CAP 4.7uF 6.3V", "CAP CER 4.7UF 6.3V X5R 0603/0805", Operating Temperature="-55°C ~ 85°C", Package=0603/0805, Rating=6.3V, Temperature Coefficient=X5R, Tolerance=10%
C19 C31 C38: library part "CAP 10uF 35V", "CAP CER 10UF 35V X7R 0805", Operating Temperature="-55°C ~ 125°C", Package=0805, Rating=35V, Temperature Coefficient=X7R, Tolerance=10%
C20 C32 C36 C37: library part "CAP 0.10uF 35V", "CAP CER 0.10UF 35V X7R 0603/0805", Operating Temperature="-55°C ~ 125°C", Package=0603/0805, Temperature Coefficient=X7R, Tolerance=10%
C21 C22 C23 C24: library part "CAP POL 1000uF", "United Chemi-Con / ESMQ251VSN102MQ45S", Capacitance=1mF, Case/Package=Radial, Dielectric Material=Aluminium, Manufacturer="United Chemi-Con", Manufacturer Part Number=ESMQ251VSN102MQ45S, Max Operating Temperature=85°C, Min Operating Temperature=-40°C, Ripple Current=960mA, Supplier Part Number 1=565-2754-ND, Tolerance=20%, Voltage=250V, Diameter=25.4mm, Height - Seated (Max)=45mm, Lead Diameter=2mm, Lead Free="Lead Free", Lead Pitch=10mm, Life (Hours)=2000Hour, Mount="Through Hole,PCB", Number of Pins=2, REACH SVHC="No SVHC", RoHS=Yes, Supplier 1=Digi-Key, Termination=Radial
C25: library part "CAP POL 680uF TH", "NICHICON   UHW1V681MPD6 ALUMINUM ELECTROLYTIC CAPACITOR, 680UF, 35V, 20%, RADIAL, FULL REEL", Case/Package=Radial, Dielectric Material=Aluminium, Manufacturer=Nichicon, Manufacturer Part Number=UHW1V681MPD6, Supplier Part Number 1=493-6804-ND, Tolerance=20%, Voltage=35V, Capacitance=680uF, Number of Pins=2, RoHS=Yes, Supplier 1=Digi-Key, Termination=Radial
C33: library part "CAP 2.2uF 16V", "CAP CER 2.2UF 16V X5R 0603/0805", Operating Temperature="-55°C ~ 85°C", Package=0603/0805, Rating=16V, Temperature Coefficient=X5R, Tolerance=10%
C34 C35: library part "CAP 0.1uF 630V", "CAP CER 0.1uF 630V X7R 1210", Operating Temperature="-55°C ~ 125°C", Package=1210, Rating=630V, Temperature Coefficient=X7R, Tolerance=10%
C39: library part "CAP 1.0uF 16V", "CAP CER 1.0UF 16V X5R 0603/0805", Operating Temperature="-55°C ~ 85°C", Package=0603/0805, Rating=16V, Temperature Coefficient=X5R, Tolerance=10%
C40 C41: library part "CAP 0.010uF 16V", "CAP CER 0.010UF 16V X5R 0603/0805", Operating Temperature="-55°C ~ 85°C", Package=0603/0805, Rating=16V, Temperature Coefficient=X5R, Tolerance=10%
C44 C45 C46: library part "CAP 0.1uF 25V", "CAP CER 0.1UF 25V X7R 0805", Operating Temperature="-55°C ~ 125°C", Rating=25V, Temperature Coefficient=X7R, Tolerance=10%
D1 D9: library part "DIODE ZENER 15V 3W", "Diode ZENER 15V 3W", Supplier Part Number 1=3SMBJ5929BTPMSCT-ND, Supplier 1=Digi-Key
D2: library part "DIODE SCHOTTKY 40V 3A", "Diode Schottky 40V 3A Surface Mount SMA", Current - Average Rectified (Io)=3A, Package=DO-214AC, Voltage - DC Reverse (Vr) (Max)=40V, Voltage - Forward (Vf) (Max) @ If="450mV @ 3A", ComponentLink1Description=digikey, ComponentLink1URL=https://www.digikey.ca/product-detail/en/on-semiconductor/MBR0540T1G/MBR0540T1GOSCT-ND/917967
D3 D4 D5 D6: library part "LED GREEN SMD", "Typical RED, GREEN, YELLOW, AMBER GaAs LED", Color=Green, Current - Test=20mA, Package=1206, Voltage - Forward (Vf) (Typ)=2V, Lens Transparency=Clear
D7: "Diode Switching 600V 5A DPAK", Digikey=VS-5EWH06FN-M3-ND, Digikey Link=https://www.digikey.ca/en/products/detail/vishay-semiconductor-diodes-division/VS-5EWH06FN-M3/4934509, MF="Vishay Diodes", MF PN=VS-5EWH06FN-M3
D8: library part "LED RED SMD", "Typical RED, GREEN, YELLOW, AMBER GaAs LED", Color=Red, Current - Test=20mA, Lens Color=Colorless, Package=1206, Voltage - Forward (Vf) (Typ)=1.7V, Lens Transparency=Clear
D10: library part "DIODE ZENER 3.3 500mW", "Zener 3V3 Voltage Regulator, 500 mW, 2-Pin SOD-123, Pb-Free, Tape and Reel", Manufacturer="On Semiconductor", Supplier Part Number 1=MMSZ4684T1GOSCT-ND, ComponentLink1Description="Manufacturer URL", ComponentLink1URL=http://www.onsemi.com/, ComponentLink2Description=Datasheet, ComponentLink2URL=http://www.onsemi.com/pub_link/Collateral/MMSZ4678T1-D.PDF, ComponentLink3Description="Package Specification", ComponentLink3URL=http://www.onsemi.com/pub_link/Collateral/425-04.PDF, DatasheetVersion="Rev. 9", Mounting Technology="Surface Mount", P Max (W)=0.5, PackageDescription="2-Pin SOD, Body 1.6 x 2.69 mm", PackageReference=SOD-123-2-425-04, PackageVersion="Rev. G, 10/2009", Packing="Tape and Reel", PartNumber=MMSZ4684T1G, RoHS=Pb-Free, Supplier 1=Digi-Key, VZ Typ (V)=3.3
D11: "TVS Diode Bidirectional Vbr = 3.5V, Working Voltage = 3.3V", Arrow Part Number=CPDV5-3V3UP, Manufacturer_Name="Comchip Technology", Mouser Part Number=750-CPDV5-3V3UP, Supplier Part Number 1=641-1422-1-ND, Arrow Price/Stock=https://www.arrow.com/en/products/cpdv5-3v3up/comchip-technology, Datasheet Link=http://www.comchiptech.com/admin/files/product/CPDV5-3V3UP-HF%20RevB181493.pdf, Height=1.1mm, Manufacturer_Part_Number=CPDV5-3V3UP, Mouser Price/Stock=https://www.mouser.com/Search/Refine.aspx?Keyword=750-CPDV5-3V3UP, Supplier 1=Digi-Key
D12 D14: library part "DIODE STANDARD 600V 5A", "Diode Standard 600V 5A Surface Mount SMB", Supplier Part Number 1=1655-1530-1-ND, Supplier 1=Digi-Key
D13 D15: library part "DIODE SCHOTTKY 20V 1A", "Diode Schottky 20V 1A Surface Mount SOD-123FL", Current Rating=1A, Package=SOD-123, Voltage Rating=20V, ComponentLink1Description=digikey, ComponentLink1URL=https://www.digikey.ca/product-detail/en/on-semiconductor/MBR0540T1G/MBR0540T1GOSCT-ND/917967, Digikey=SM5817PL-TPMSCT-ND, Digikey Link=https://www.digikey.ca/product-detail/en/micro-commercial-co/SM5817PL-TP/SM5817PL-TPMSCT-ND/1793410, MF="Micro Commercial Co", MP=SM5817PL-TP
F1: library part "FUSE BLADE", "Fuse Block 30A 500V 1 Circuit Blade Through Hole", Package="Nonstandard Keystone", Availability=Unavailable, MF="Keystone Electronics", MP=3557-2, Price=None, SnapEDA_Link=https://www.snapeda.com/parts/3557-2/Keystone%20Electronics/view-part/278060/?ref=snap, Supplier 1=Digi-Key
L1: library part "IND 15UH 3.2A 50 MOHM", "15µH Semi-Shielded Wirewound Inductor 2.4A 70mOhm Max Nonstandard", Current - Saturation=4A, DC Resistance (DCR)=50mOhm, Inductance=15.0uH, Operating Temperature="-40°C ~ 125°C", ComponentLink1Description=digikey, ComponentLink1URL=https://www.digikey.ca/en/products/detail/bourns-inc/SRU1048-8R2Y/2352912, Digikey=SRN8040TA-150MCT-ND, Digikey Link=https://www.digikey.ca/en/products/detail/bourns-inc/SRN8040TA-150M/6155130, Height - Seated (Max)=4.2mm, MF="Bourns Inc.", MP=SRN8040TA-150M, Size / Dimension="0.512\"\" L x 0.512\"\" W (13.00mm x 13.00mm)", Supplier 1=Digi-Key
L2: library part "IND 3.3UH 5.6A 21 MOHM SMD", "3.3µH Semi-Shielded Wirewound Inductor 5.6A 21mOhm Max Nonstandard", Inductance=3.3uH, Package=Nonstandard, ComponentLink1Description=digikey, ComponentLink1URL=https://www.digikey.ca/en/products/detail/bourns-inc/SRU1048-8R2Y/2352912, Digikey=SRN8040-3R3YCT-ND, Digikey Link=https://www.digikey.ca/en/products/detail/bourns-inc/SRN8040-3R3Y/2756131, MF="Bourns Inc.", MP=SRN8040-3R3Y, Price=None
P1: library part "XT60 Connector", "XT60 CONNECTORS FEMALE PAIR", Supplier Part Number 1=1568-1816-ND, Digikey=1568-1816-ND, Digikey Link=https://www.digikey.ca/product-detail/en/sparkfun-electronics/PRT-10474/1568-1816-ND/8258064, MF="SparkFun Electronics", MP=PRT-10474, Package=XT60, Price="2.13000 CAD", Supplier 1=Digi-Key
P3 P4: library part "CN MOLEX 4365002XX", "MOLEX MICROFIT 2CKT RIGHT THRU", Package=Microfit, Digikey=WM17581-ND, Digikey Link=https://www.digikey.com/en/products/detail/molex/0436500205/3310532?s=N4IgTCBcDaICwGYBsBWADGsaUgLoF8g, MF=MOLEX, MP=4365002XX, Price="1.44 CAD", Supplier 1=Digi-Key, Supplier Part Number 2=WM17581-ND
Q1 Q2: library part "MOSFET AON6407", "MOSFET P-CH 30V 32A 8DFN", Package=8-PowerSMD, Supplier Part Number 1=785-1421-1-ND, Digikey=785-1421-1-ND, Digikey Link=https://www.digikey.ca/product-detail/en/alpha-omega-semiconductor-inc/AON6407/785-1421-1-ND/3466800, MF="Alpha & Omega Semiconductor Inc.", MP=AON6407, Supplier 1=Digi-Key
Q3: library part "MOSFET IPD320N20N3GATMA1", "MOSFET N-CH 34A 200V DPAK", Package=DPAK, Supplier Part Number 1=IPD320N20N3GATMA1CT-ND, Digikey=IPD320N20N3GATMA1CT-ND, Digikey Link=https://www.digikey.ca/en/products/detail/infineon-technologies/IPD320N20N3GATMA1/5823324, MF=Infineon, Supplier 1=Digi-Key
Q4: Supplier Part Number 1=497-16925-1-ND, MFG=STMicroelectronics, Supplier=Digikey, Supplier 1=Digi-Key, Supplier PN=497-16925-1-ND
Q5: "Small Signal N-Ch, 600Vds", MFG="Diodes Incorporated", Supplier=Digikey, Supplier PN=BSS127SSN-7DICT-ND
Q6 Q7: "IGBT Field Stop 600V 150A 750W Through Hole PowerTO-247-3", Package="TO-247 Fairchild Semiconductor", Power=750W, Supplier Part Number 1=FGY75N60SMDFS-ND, Ic max=150A, MF="ON Semiconductor", MP=FGY75N60SMD, Supplier 1=Digi-Key, Topology="Field Stop IGBT", Vce max=600V, Vge max=±20V
R1 R2 R27 R28 R29 R41: library part "RES 100k 1/8W - 1%", "RES SMD 100K OHM 1% 1/8W 0805", Package=0805, Power (Watts)=0.125W, Tolerance=1%
R3 R4 R6 R9 R10 R13 R17 R30 R47 R49: library part "RES 10k 1/8W - 1%", "RES SMD 10K OHM 1% 1/8W 0805", Package=0805, Power (Watts)=0.125W, Tolerance=1%
R5 R8: library part "RES 10.0 1/8W - 1%", "RES SMD 10.0 OHM 1% 1/8W 0805", Package=0805, Power (Watts)=0.125W, Tolerance=1%
R7: library part "RES 2m 1W", "RES SMD 2m OHM 1% 1W 1206", Package=1206, Power (Watts)=1W, Tolerance=1%, Resistance=2mOHM
R11: library part "RES 169k 1/8W", "RES SMD 169K OHM 1% 1/8W 0805", Package=0805, Power (Watts)=0.125W, Tolerance=1%, ComponentLink1Description=digikey, ComponentLink1URL=https://www.digikey.ca/en/products/detail/yageo/RC0805FR-07169KL/727634
R12: library part "RES 10.2k 1/8W", "RES SMD 10.2K OHM 1% 1/8W 0805", Package=0805, Power (Watts)=0.125W, Tolerance=1%, ComponentLink1Description=digikey, ComponentLink1URL=https://www.digikey.ca/en/products/detail/panasonic-electronic-components/ERJ-6ENF1022V/111476
R14: library part "RES 18.7K 1/8W", "RES SMD 18.7K OHM 1% 1/8W 0805", Alternative Package=1206, Package=0805, Power (Watts)=0.125W, Tolerance=1%
R15: library part "RES 732.0 1/8W", "RES SMD 732 OHM 1% 1/8W 0805", Package=0805, Power (Watts)=0.125W, Tolerance=1%
R16: library part "RES 56.2k 1/10W", "RES SMD 56.2K OHM 1% 1/10W 0603", Package=0603, Power (Watts)=0.1W, Tolerance=1%
R18 R46 R48: library part "RES 110.0 1/8W - 1%", "RES SMD 110 OHM 1% 1/8W 0805", Package=0805, Power (Watts)=0.125W, Tolerance=1%
R19: library part "RES 270.0 1/8W", "RES SMD 270 OHM 5% 1/8W 0805", Package=0805, Power (Watts)=0.125W, Tolerance=5%
R20: library part "RES 1k 1/8W", "RES SMD 1K OHM 5% 1/8W 0805", Package=0805, Power (Watts)=0.125W, Tolerance=5%
R21: library part "RES 1.96k 1/8W", "RES SMD 1.96K OHM 1% 1/8W 0805", Package=0805, Power (Watts)=0.125W, Tolerance=1%
R22: library part "RES 174k 1/8W", "RES SMD 174K OHM 1% 1/8W 0805", Case Code (Imperial)=0805, Case Code (Metric)=2012, Manufacturer=Yageo, Manufacturer Part Number=RC0805FR-07174KL, Max Operating Temperature=155°C, Max Power Dissipation=125mW, Min Operating Temperature=-55°C, Package Quantity=1, Resistance=174kR, Supplier Part Number 1=311-174KCRCT-ND, Temperature Coefficient=100ppm/°C, Tolerance=1%, Voltage Rating=150V, Case/Package=0805, Category="Chip SMD Resistors", ComponentLink1Description=https://datasheet.ciiva.com/2509/pyu-r-int-thick-7-2509472.pdf?src-supplier=Digi-Key, ComponentLink1URL=https://datasheet.ciiva.com/2509/pyu-r-int-thick-7-2509472.pdf?src-supplier=Digi-Key, ComponentLink2Description=https://datasheet.ciiva.com/2509/pyu-r-int-thick-7-2509471.pdf?src-supplier=Digi-Key, ComponentLink2URL=https://datasheet.ciiva.com/2509/pyu-r-int-thick-7-2509471.pdf?src-supplier=Digi-Key, ComponentLink3Description=https://datasheet.ciiva.com/2509/pyu-r-int-thick-7-2509473.pdf?src-supplier=Digi-Key, ComponentLink3URL=https://datasheet.ciiva.com/2509/pyu-r-int-thick-7-2509473.pdf?src-supplier=Digi-Key, Composition="Thick Film", Contact Plating=Tin,Matte, Depth=1.25mm, Features="Moisture Resistant", Height=0.024inch, Lead Free="Lead Free", Length=2mm, Military Standard=Not, Number of Terminations=2, Packaging="Tape and Reel", Power Rating=125mW, Pricing 1="1=0.10000, 10=0.04000, 100=0.01630, 1000=0.00731, 2500=0.00635 (USD)", Radiation Hardening=No, RoHS=Yes, Stock 1=27863, Supplier 1=Digi-Key, Termination=SMD/SMT, Voltage Rating (DC)=150V, Width=0.049inch
R23: library part "RES 255k 0805", "0805 Resistor, 6A, 0.125W, 25ppm, 0.1%, 255K", Case Code (Imperial)=0805, Case Code (Metric)=2012, Manufacturer=Panasonic, Manufacturer Part Number=ERA-6AEB2553V, Max Operating Temperature=155°C, Max Power Dissipation=125mW, Min Operating Temperature=-55°C, Package Quantity=1, Resistance=255kR, Supplier Part Number 1=P255KDACT-ND, Temperature Coefficient=25ppm/°C, Tolerance=0.1%, Voltage Rating=200V, Voltage Rating (DC)=100V, Case/Package=0805, Category="Chip SMD Resistors", ComponentLink1Description=https://datasheet.ciiva.com/11810/0900766b80eb1d8c-11810615.pdf?src-supplier=RSComponents, ComponentLink1URL=https://datasheet.ciiva.com/11810/0900766b80eb1d8c-11810615.pdf?src-supplier=RSComponents, ComponentLink2Description=https://datasheet.ciiva.com/41450/001181380-da-01-en-widerstand-era-0805-255k-0-1-5000st-41450539.pdf?src-supplier=Conrad, ComponentLink2URL=https://datasheet.ciiva.com/41450/001181380-da-01-en-widerstand-era-0805-255k-0-1-5000st-41450539.pdf?src-supplier=Conrad, ComponentLink3Description=https://datasheet.ciiva.com/5981/485442-5981317.pdf?src-supplier=Farnell, ComponentLink3URL=https://datasheet.ciiva.com/5981/485442-5981317.pdf?src-supplier=Farnell, ComponentLink4Description=https://datasheet.ciiva.com/5981/485442-5981318.pdf?src-supplier=Farnell, ComponentLink4URL=https://datasheet.ciiva.com/5981/485442-5981318.pdf?src-supplier=Farnell, ComponentLink5Description=https://datasheet.ciiva.com/5981/485442-5981319.pdf?src-supplier=Farnell, ComponentLink5URL=https://datasheet.ciiva.com/5981/485442-5981319.pdf?src-supplier=Farnell, ComponentLink6Description=https://datasheet.ciiva.com/5981/485442-5981320.pdf?src-supplier=Farnell, ComponentLink6URL=https://datasheet.ciiva.com/5981/485442-5981320.pdf?src-supplier=Farnell, ComponentLink7Description=https://datasheet.ciiva.com/17206/aoa0000ce26-17206655.pdf?src-supplier=Avnet+Europe, ComponentLink7URL=https://datasheet.ciiva.com/17206/aoa0000ce26-17206655.pdf?src-supplier=Avnet+Europe, Composition="Metal Film,Thin Film", Contact Plating=Tin, Depth=1.25mm, Features="Automotive AEC-Q200", Height=0.5mm, Lead Free="Lead Free", Length=2mm, Military Standard=Not, Mount="Surface Mount", Number of Pins=2, Number of Terminations=2, Packaging="Tape and Reel", Power Rating=125mW, Pricing 1="1=0.36000, 10=0.30200, 100=0.11820, 1000=0.04948, 2500=0.04536 (USD)", Radiation Hardening=No, REACH SVHC="No SVHC", RoHS=Yes, Stock 1=7869, Supplier 1=Digi-Key, Termination=SMD/SMT, Weight=0.000194oz, Width=1.25mm
R24: library part "RES 330k 1/8W - 1%", "RES SMD 274K OHM 1% 1/8W 0805"
R25: library part "RES 495k 1/8W", "RES SMD 499K OHM 1% 1/8W 0805", Case Code (Imperial)=0805, Case Code (Metric)=2012, Manufacturer=Yageo, Manufacturer Part Number=RC0805FR-07499KL, Max Operating Temperature=155°C, Min Operating Temperature=-55°C, Power Rating=125mW, Resistance=499kR, Supplier Part Number 1=311-499KCRCT-ND, Temperature Coefficient=100ppm/°C, Tolerance=1%, Voltage Rating=150V, Case/Package=0805, Category="Chip SMD Resistors", ComponentLink1Description=https://datasheet.ciiva.com/15189/getdatasheetpartid-326570-15189975.pdf?src-supplier=Verical, ComponentLink1URL=https://datasheet.ciiva.com/15189/getdatasheetpartid-326570-15189975.pdf?src-supplier=Verical, Composition="Thick Film", Contact Plating=Tin,Lead,Matte, Depth=1.25mm, Lead Free="Lead Free", Length=2mm, Military Standard=Not, Packaging="Tape and Reel", Pricing 1="1=0.10000, 10=0.04000, 100=0.01630, 1000=0.00731, 2500=0.00635 (USD)", Radiation Hardening=No, RoHS=Yes, Stock 1=2275, Supplier 1=Digi-Key, Termination=SMD/SMT, Voltage Rating (DC)=150V
R26 R32: library part "RES 25.5k 1/8W", "RES SMD 25.5K OHM 0.1% 1/8W 0805", Case Code (Imperial)=0805, Case Code (Metric)=2012, Manufacturer=Panasonic, Manufacturer Part Number=ERA-6AEB2552V, Max Operating Temperature=155°C, Max Power Dissipation=125mW, Min Operating Temperature=-55°C, Package Quantity=1, Resistance=25.5kR, Supplier Part Number 1=P25.5KDACT-ND, Temperature Coefficient=25ppm/°C, Tolerance=0.1%, Voltage Rating=100V, Case/Package=0805, Category="Chip SMD Resistors", ComponentLink1Description=https://datasheet.ciiva.com/11810/0900766b80eb1d8c-11810651.pdf?src-supplier=RSComponents, ComponentLink1URL=https://datasheet.ciiva.com/11810/0900766b80eb1d8c-11810651.pdf?src-supplier=RSComponents, ComponentLink2Description=https://datasheet.ciiva.com/26335/459526-da-01-en-widerstand-0805-era-26335831.pdf?src-supplier=Conrad, ComponentLink2URL=https://datasheet.ciiva.com/26335/459526-da-01-en-widerstand-0805-era-26335831.pdf?src-supplier=Conrad, ComponentLink3Description=https://datasheet.ciiva.com/7870/485442-7870651.pdf?src-supplier=Element14, ComponentLink3URL=https://datasheet.ciiva.com/7870/485442-7870651.pdf?src-supplier=Element14, ComponentLink4Description=https://datasheet.ciiva.com/5987/485442-5987308.pdf?src-supplier=Farnell, ComponentLink4URL=https://datasheet.ciiva.com/5987/485442-5987308.pdf?src-supplier=Farnell, ComponentLink5Description=https://datasheet.ciiva.com/7870/485442-7870652.pdf?src-supplier=Element14, ComponentLink5URL=https://datasheet.ciiva.com/7870/485442-7870652.pdf?src-supplier=Element14, ComponentLink6Description=https://datasheet.ciiva.com/30151/54aoa0000ce26-30151583.pdf?src-supplier=Onlinecomponents.com, ComponentLink6URL=https://datasheet.ciiva.com/30151/54aoa0000ce26-30151583.pdf?src-supplier=Onlinecomponents.com, ComponentLink7Description=https://datasheet.ciiva.com/9191/aoa0000ce26-9191422.pdf?src-supplier=Avnet, ComponentLink7URL=https://datasheet.ciiva.com/9191/aoa0000ce26-9191422.pdf?src-supplier=Avnet, Composition="Metal Film,Thin Film", Contact Plating=Tin, Depth=1.25mm, Features="Automotive AEC-Q200", Height=0.5mm, Lead Free="Lead Free", Length=2mm, Military Standard=Not, Mount="Surface Mount", Number of Pins=2, Number of Terminations=2, Packaging="Tape and Reel", Power Rating=125mW, Pricing 1="1=0.36000, 10=0.30200, 100=0.11820, 1000=0.04948, 2500=0.04536 (USD)", Radiation Hardening=No, RoHS=Yes, Stock 1=5872, Supplier 1=Digi-Key, Termination=Solder, Voltage Rating (DC)=100V, Width=1.25mm
R31: library part "RES 11.5k 1/8W", "RES SMD 11.5K OHM 0.1% 1/8W 0805 Thin Film", Case Code (Imperial)=0805, Case Code (Metric)=2012, Manufacturer=Panasonic, Manufacturer Part Number=ERA-6AEB1152V, Max Operating Temperature=155°C, Max Power Dissipation=125mW, Min Operating Temperature=-55°C, Package Quantity=1, Resistance=11.5kR, Supplier Part Number 1=P11.5KDACT-ND, Temperature Coefficient=25ppm/°C, Tolerance=0.1%, Voltage Rating=100V, Case/Package=0805, Category="Chip SMD Resistors", ComponentLink1Description=https://datasheet.ciiva.com/11810/0900766b80eb1d8c-11810868.pdf?src-supplier=RSComponents, ComponentLink1URL=https://datasheet.ciiva.com/11810/0900766b80eb1d8c-11810868.pdf?src-supplier=RSComponents, ComponentLink2Description=https://datasheet.ciiva.com/41450/001181306-da-01-en-widerstand-era-0805-11k5-0-1-5000st-41450464.pdf?src-supplier=Conrad, ComponentLink2URL=https://datasheet.ciiva.com/41450/001181306-da-01-en-widerstand-era-0805-11k5-0-1-5000st-41450464.pdf?src-supplier=Conrad, ComponentLink3Description=https://datasheet.ciiva.com/5987/485442-5987301.pdf?src-supplier=Farnell, ComponentLink3URL=https://datasheet.ciiva.com/5987/485442-5987301.pdf?src-supplier=Farnell, ComponentLink4Description=https://datasheet.ciiva.com/7829/485442-7829142.pdf?src-supplier=Element14, ComponentLink4URL=https://datasheet.ciiva.com/7829/485442-7829142.pdf?src-supplier=Element14, ComponentLink5Description=https://datasheet.ciiva.com/17211/aoa0000ce26-17211855.pdf?src-supplier=Avnet+Europe, ComponentLink5URL=https://datasheet.ciiva.com/17211/aoa0000ce26-17211855.pdf?src-supplier=Avnet+Europe, ComponentLink6Description=https://datasheet.ciiva.com/7829/485442-7829143.pdf?src-supplier=Element14, ComponentLink6URL=https://datasheet.ciiva.com/7829/485442-7829143.pdf?src-supplier=Element14, ComponentLink7Description=https://datasheet.ciiva.com/9193/aoa0000ce26-9193735.pdf?src-supplier=Avnet, ComponentLink7URL=https://datasheet.ciiva.com/9193/aoa0000ce26-9193735.pdf?src-supplier=Avnet, ComponentLink8Description=https://datasheet.ciiva.com/24024/aoa0000ce26-197354-24024328.pdf?src-supplier=Mouser, ComponentLink8URL=https://datasheet.ciiva.com/24024/aoa0000ce26-197354-24024328.pdf?src-supplier=Mouser, Composition="Thin Film,Metal Film", Contact Plating=Tin, Depth=1.25mm, Features="Automotive AEC-Q200", Height=0.5mm, Lead Free="Lead Free", Length=2mm, Military Standard=Not, Mount="Surface Mount", Number of Pins=2, Number of Terminations=2, Packaging="Tape and Reel", Power Rating=125mW, Pricing 1="1=0.34000, 10=0.28800, 100=0.11260, 1000=0.04712, 2500=0.04320 (USD)", Radiation Hardening=No, RoHS=Yes, Stock 1=10661, Supplier 1=Digi-Key, Termination=Solder, Voltage Rating (DC)=100V, Width=1.25mm
R33: library part "RES 7m 3W", "RES SMD 7m OHM 1% 3W 2512", Package=1206, Power (Watts)=3W, Tolerance=1%, MFG=VISHAY, Resistance=7mOHM
R34: library part "RES 1.05k 1/8W", "RES SMD 1.05K OHM 0.1% 1/8W 0805", Package=0805, Supplier Part Number 1=P1.05KDACT-ND, Tolerance=0.1%, Supplier 1=Digi-Key, Wattage=0.125W
R35 R37: library part "RES 18k 1W", "RES SMD 18K OHM 5% 1W 2512", Package=0805, Power (Watts)=1W, Tolerance=5%
R36 R39: library part "RES 5.1M 1/8W-5%", "RES SMD 5.1 MOHM 5% 1/8W 0805", Package=0805, Power (Watts)=0.125W, Tolerance=5%
R38: library part "RES 1.5k 50W", "RES SMD 1.5K OHM 1% 50W D2PAK", Package="D2PAK (TO-263)", Power (Watts)=50W, Tolerance=1%
R40: library part "RES 270k 1/8W", "RES SMD 270K OHM 5% 1/8W 0805", Package=0805, Power (Watts)=0.125W, Tolerance=5%
R42 R43 R44: library part "RES 330k 1/8W - 5%", "RES SMD 330K OHM 5% 1/8W 0805", Package=0805, Power (Watts)=0.125W, Tolerance=5%
R45: library part "RES 13k 1/8W", "RES SMD 13K OHM 5% 1/8W 0805", Package=0805, Power (Watts)=0.125W, Tolerance=5%
S1: library part "SW SLIDE", "SWITCH SLIDE SPST 8.5A 125V", Rating="8.5A 125V", ComponentLink1Description=Digikey, ComponentLink1URL=https://www.digikey.ca/product-detail/en/zf-electronics/SRB22A2FBBNN/CH755-ND/446021, ComponentLink2Description=Datasheet, ComponentLink2URL=http://switches-sensors.zf.com/us/wp-content/uploads/sites/7/2012/10/Rocker_SRB_Datasheet1.pdf, Digikey=CWI333-ND, Digikey Link=https://www.digikey.com/en/products/detail/cw-industries/GF-123-0054/4089770, MF="CW Industries", MP=GF-123-0054, Price="1.25 CAD"
T1: "Audio Transformers / Signal Transformers DA2032 Cap Chrgr For Linear LT3750/51", Supplier Part Number 1=994-DA2034-ALB, Supplier 1=Mouser